# Altium PCB psu.PcbDoc
Units mm, origin at the board's own origin, x right, y up, seen from the top; angles counter-clockwise.
Board outline 40 x 40 mm, 2 copper layers (Top Layer, Bottom Layer); 21 components, 15 nets, 53 pads, 7 vias.
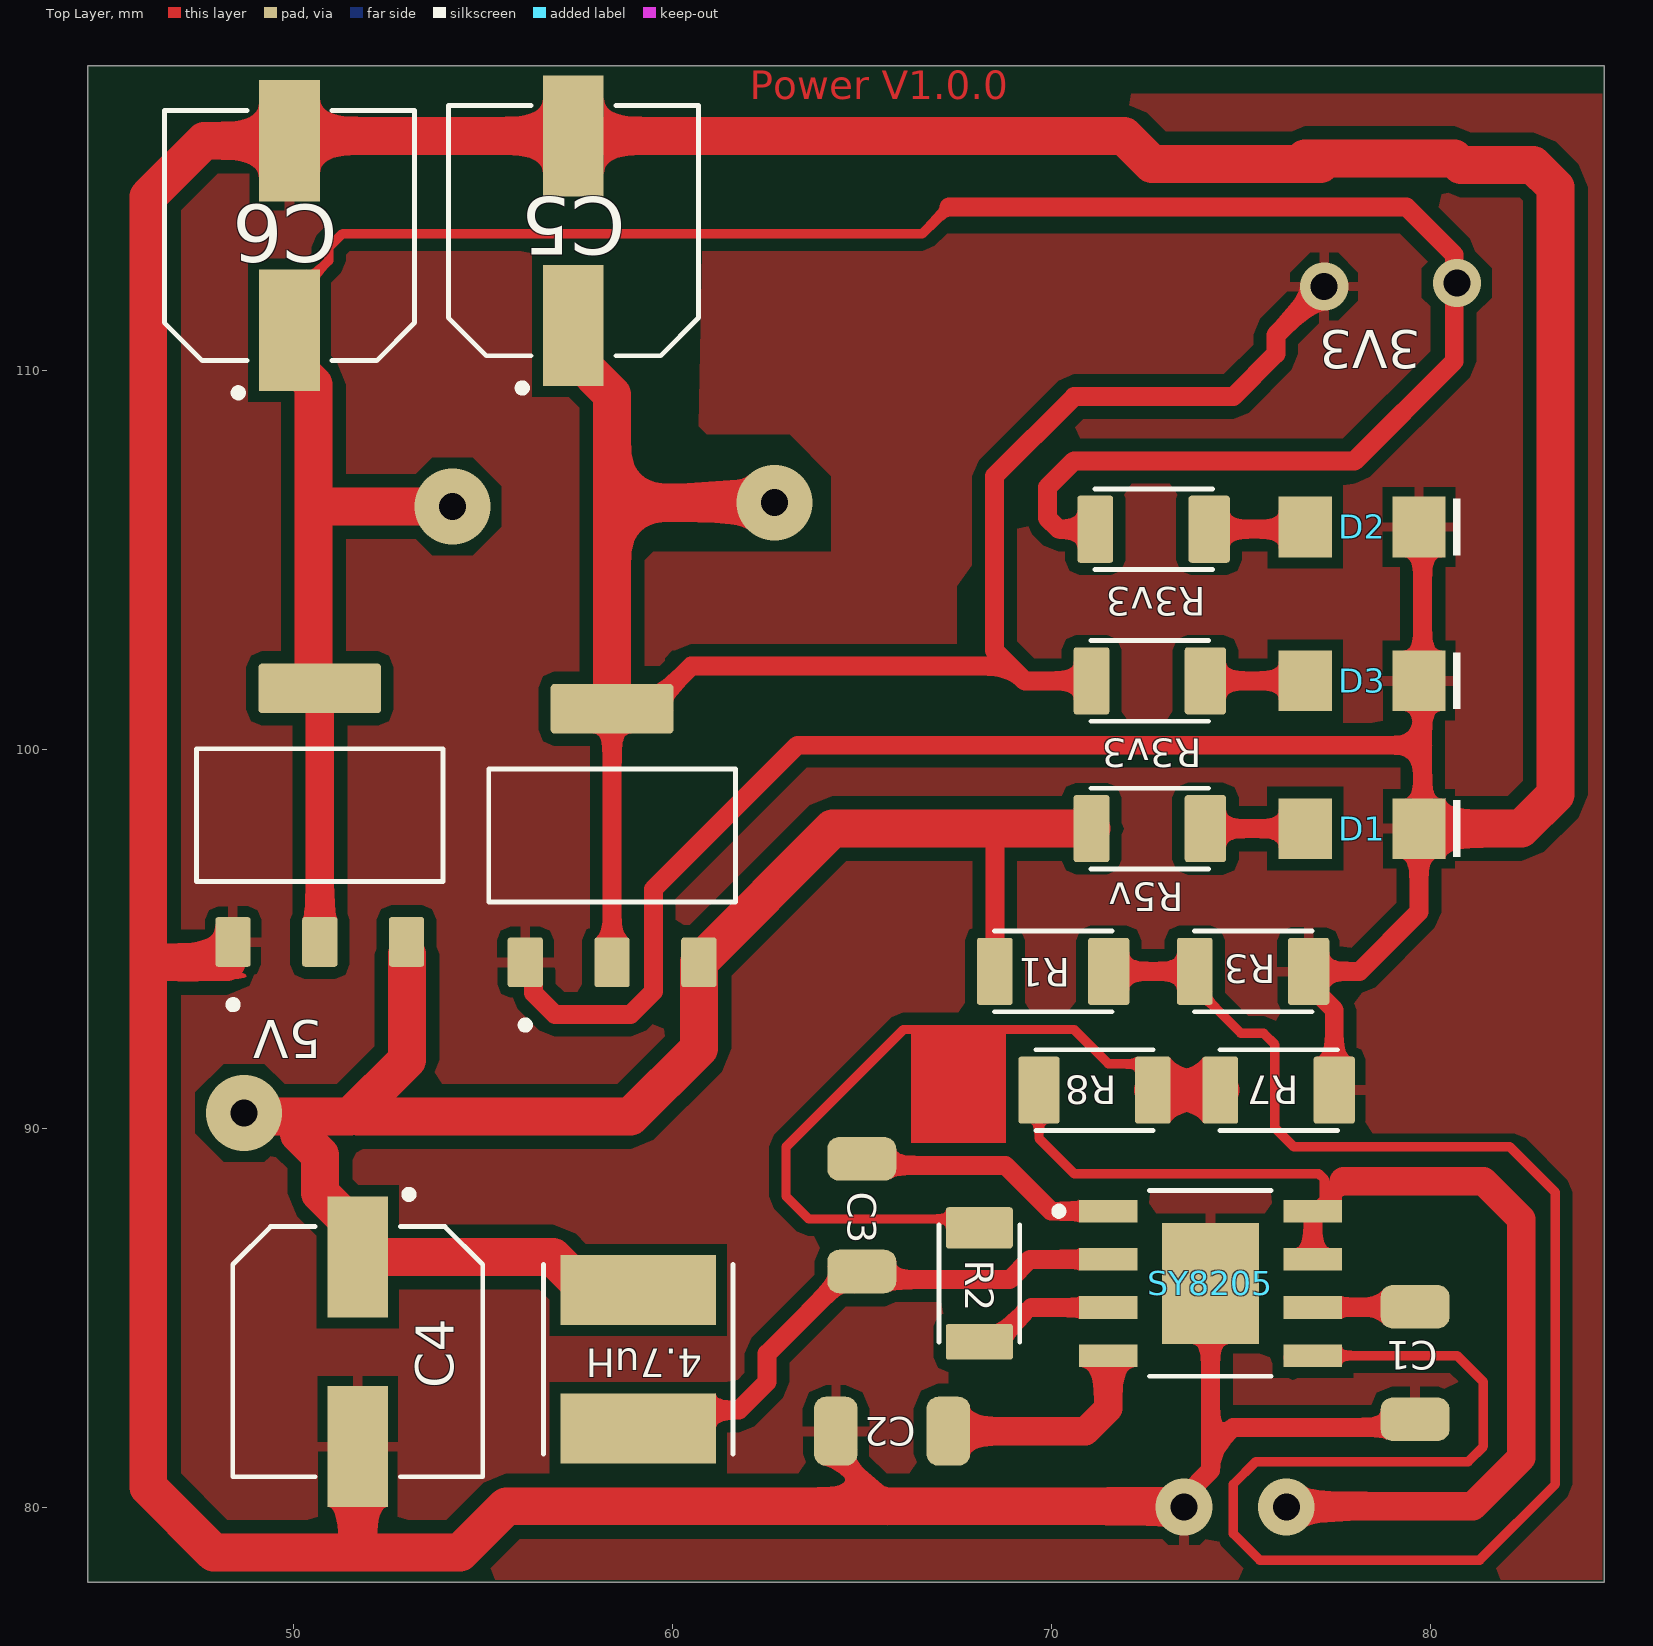
[diagram p0: Top Layer view]
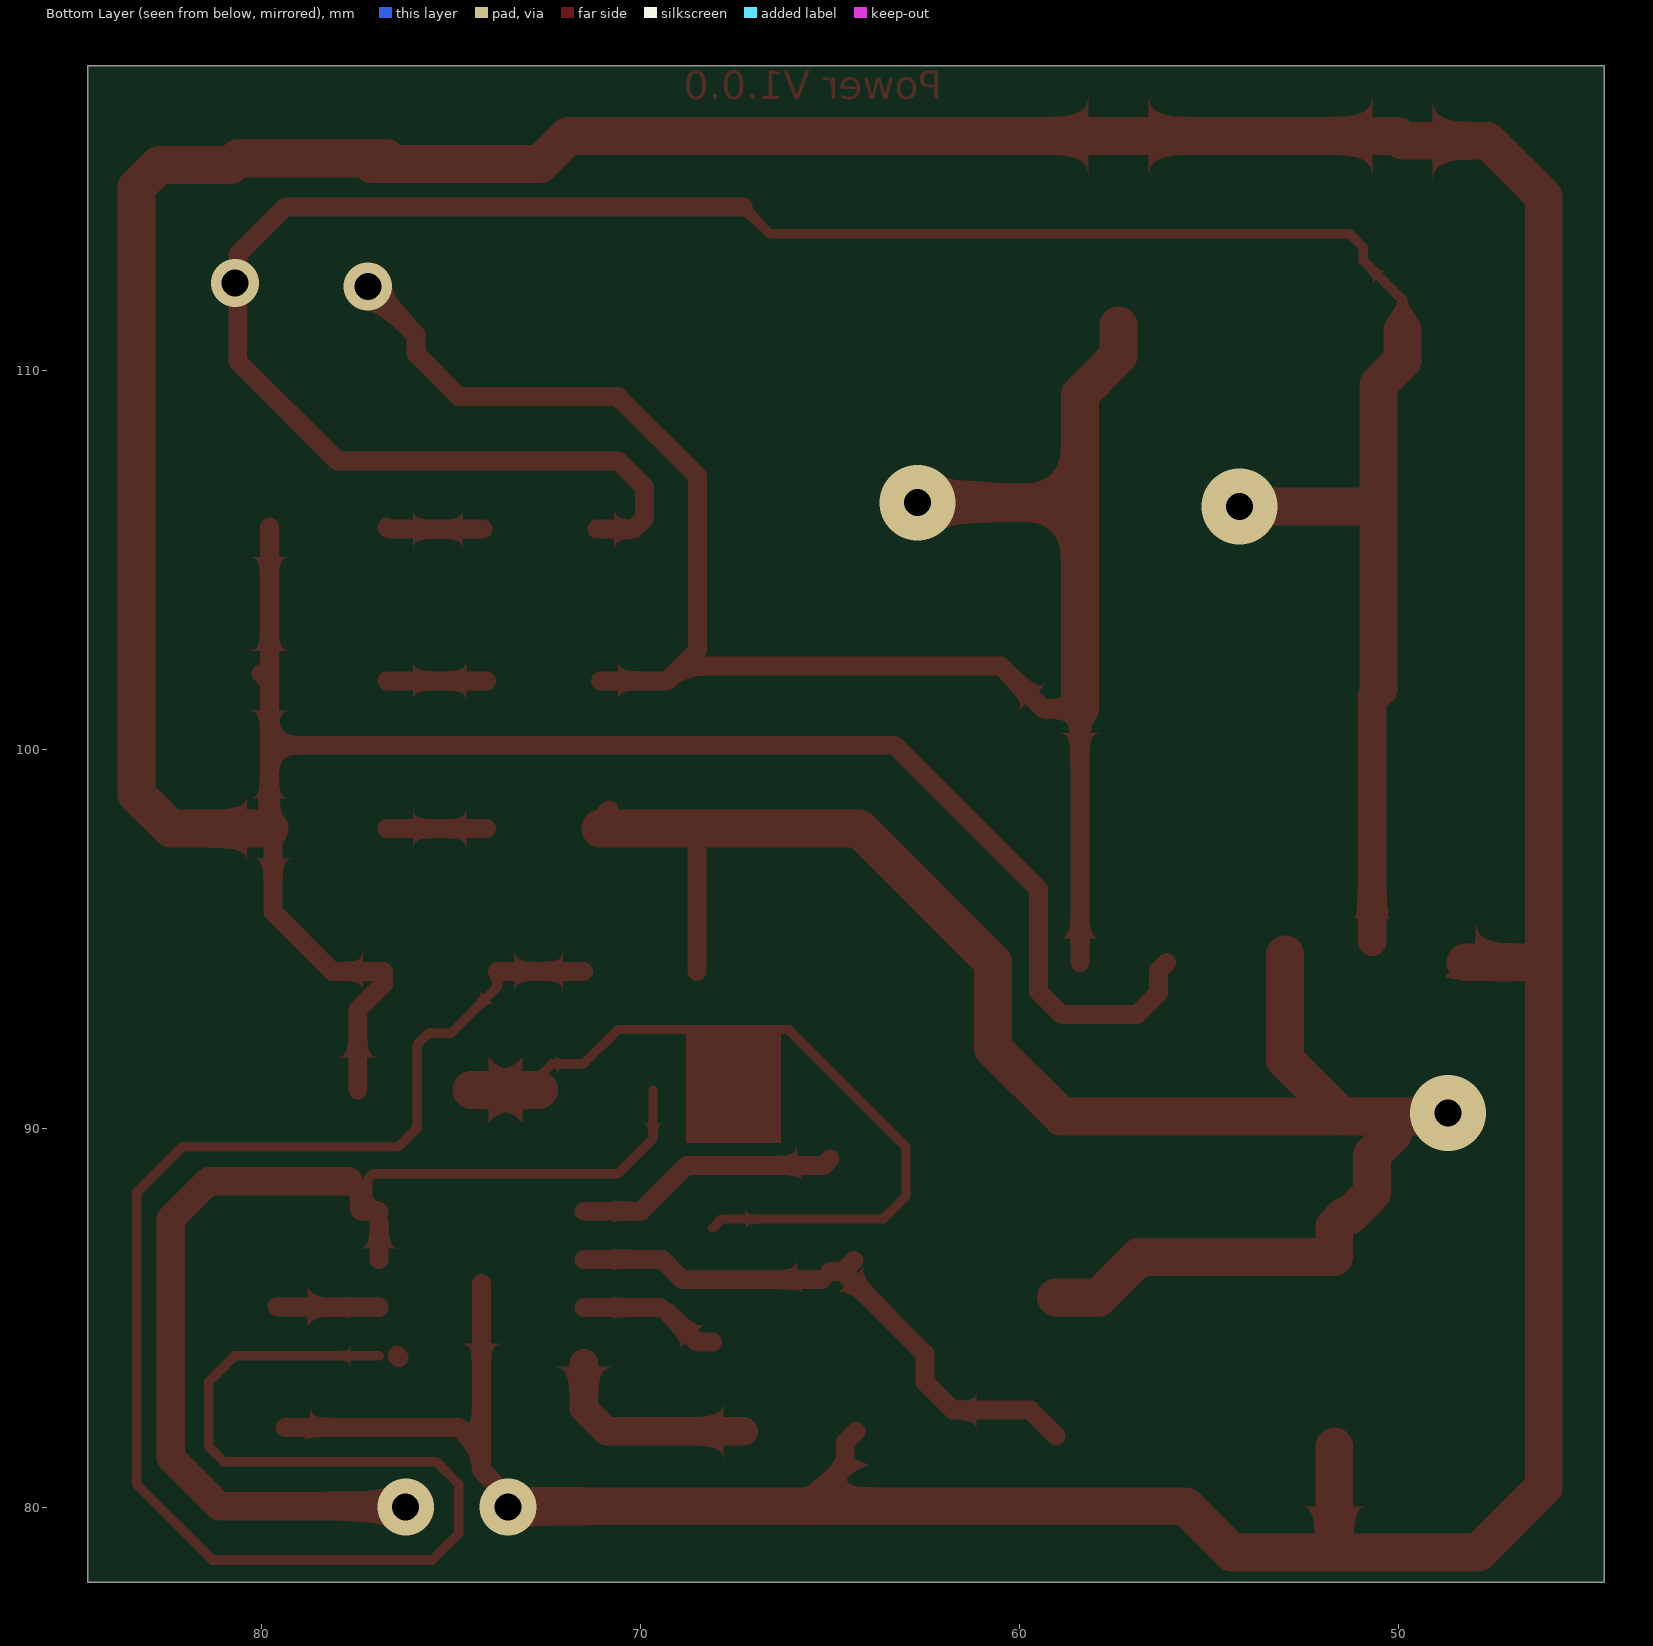
[diagram p1: Bottom Layer view, seen from below]
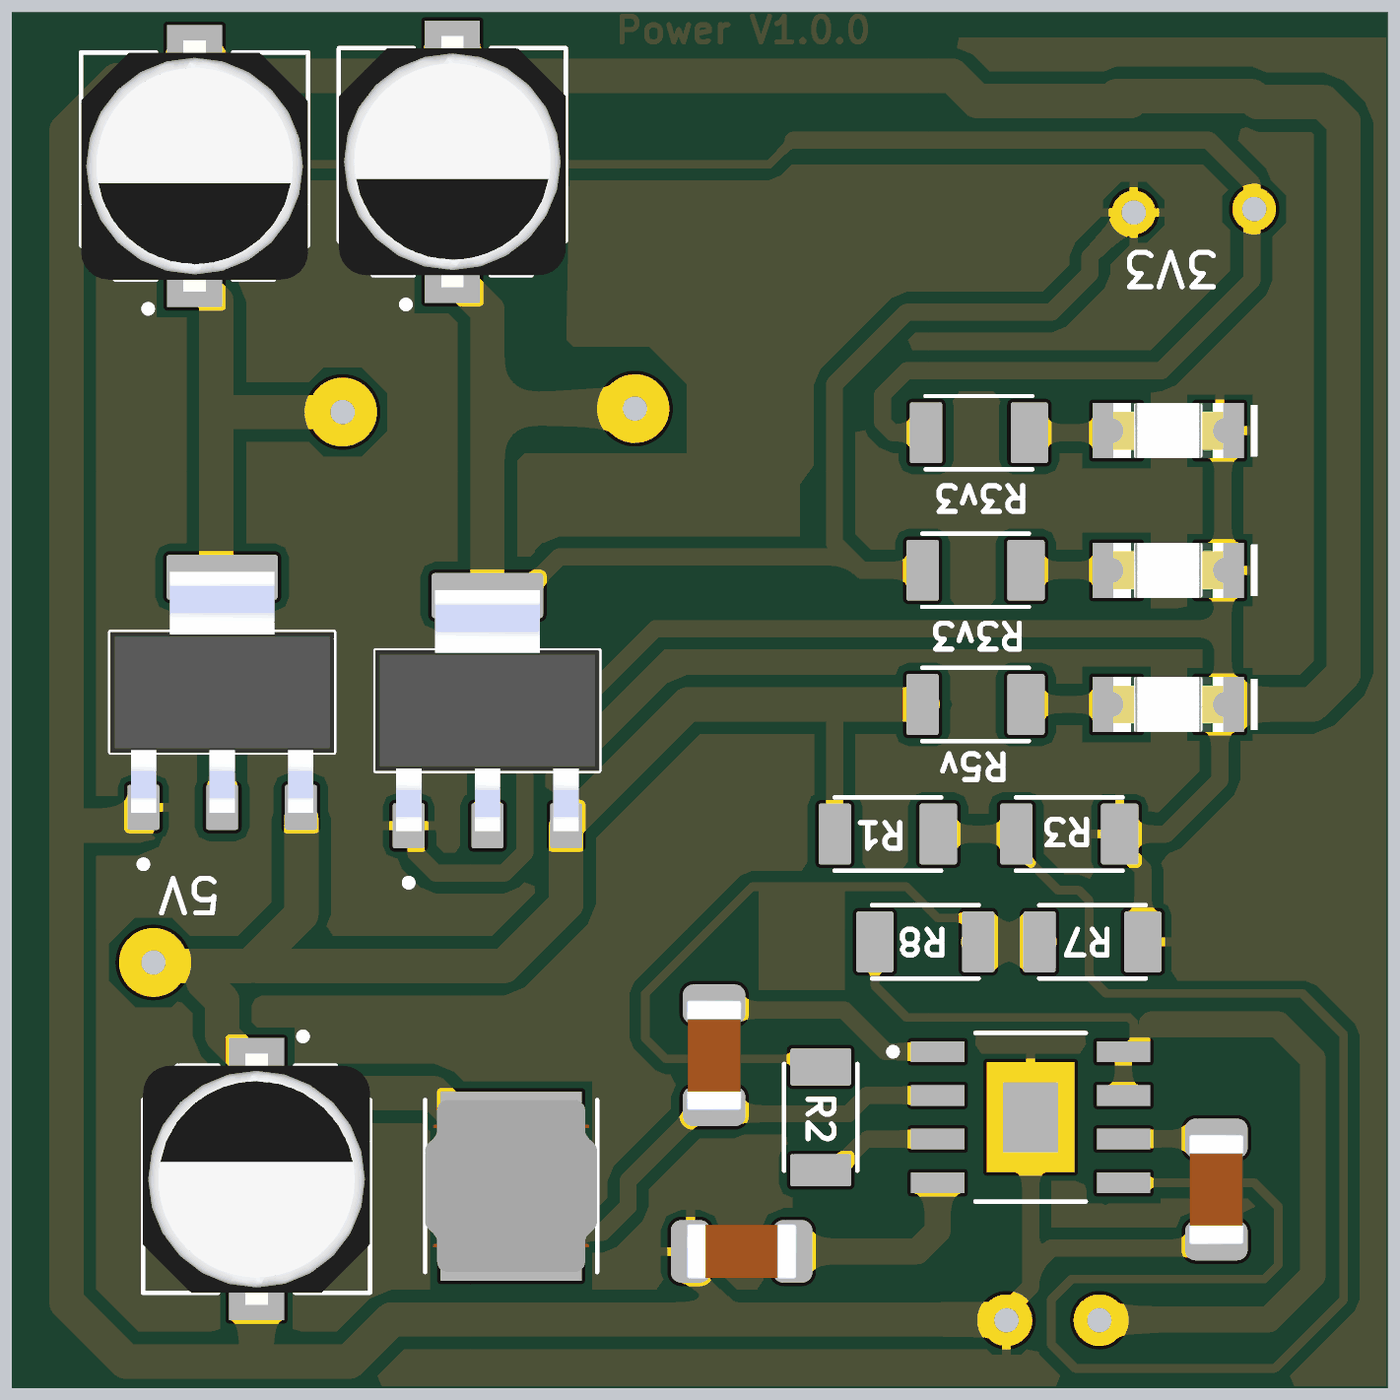
[diagram p2: 3D render of the assembled board from above, using the file's embedded part models]

## Layer stack, top to bottom
Top Solder: solder mask 0.0102, Solder Resist, Dk 3.5
Top Layer: signal copper 0.0356
Dielectric 1: dielectric 0.32, FR-4, Dk 4.8
Bottom Layer: signal copper 0.0356
Bottom Solder: solder mask 0.0102, Solder Resist, Dk 3.5

## Board outline
84.583,118.022 84.583,78.022 44.583,78.022 44.583,118.022

## Design rules (kind name [scope] priority, off if disabled: settings)
Clearance Clearance_1 [All] p1: gap=0.3 ignorepadtopadclearanceinfootprint=FALSE
PolygonConnect [All] p1: connectstyle=Relief reliefconductorwidth=0.254 reliefentries=4 polygonreliefangle="90 Angle" airgapwidth=0.254
RoutingVias [All] p1: holewidth=0.711 width=1.27 viastyle="Through Hole" minholewidth=0.711 minwidth=1.27 maxholewidth=0.711 maxwidth=1.27
SolderMaskExpansion [All] p1: expansion=0.102 istentingtop=FALSE
Width [All] p1: maxlimit=2 minlimit=0.01 preferedwidth=0.25
30 further rules are at their usual default settings.

## Classes and differential pairs
component class psu: 1K C1 C2 C3 C4 C5 C6 D1 D2 D3 L1 R1 R2 R3 R3v3 R7 R8 Sy8205 U1

## Components (designator, comment, footprint, x,y, rotation, side; value= is the part's Value field where it differs from the comment)
4.7uH "Lout" IND_LQH5BPB100MT0L 59.1,83.9 r90 top (schematic designator L1)
* "AMS1117" PCBComponent_1 49.41,106.843 r90 top
*1 "AMS1117" PCBComponent_1 57.121,106.306 r90 top
C1 "Cvcc" CAP3216X125N 79.6,83.8 r270 top
C2 "Css" CAP3216X125N 65.8,82 r180 top
C3 "Cbs" CAP3216X125N 65,87.7 r270 top
C4 "cap5v" CAP_EEEFPA221XAL 51.7,84.1 r270 top
C5 "cap3.3v" CAP_EEEFPA221XAL 57.391,113.677 r90 top
C6 "cap3.3v" CAP_EEEFPA221XAL 49.898,113.55 r90 top
D1 "Super Red, 1.9V, 140°" WL-SMCW_1206_150120xx75000 78.2,97.9 r180 top
D2 "Super Red, 1.9V, 140°" WL-SMCW_1206_150120xx75000 78.2,105.859 r180 top
D3 "Super Red, 1.9V, 140°" WL-SMCW_1206_150120xx75000 78.2,101.8 r180 top
R1 "Rfb" RESC3115X65N 70.05,94.133 r180 top
R2 "1206 10k" RESC3115X65N 68.1,85.9 r270 top
R3 "Rpd" RESC3115X65N 75.325,94.133 r180 top
R3v3 "Rled" RESC3115X65N 72.6,101.8 r180 top (schematic designator R6)
R3v3 "Rled" RESC3115X65N 72.7,105.8 r180 top (schematic designator R5)
R5v "Rled" RESC3115X65N 72.6,97.9 r180 top (schematic designator R4)
R7 "1206 100k" RESC3115X65N 76,91 r180 top
R8 "1206 100k" RESC3115X65N 71.14,91 r0 top
SY8205 "SY8205FCC" VREG_SY8205FCC 74.2,85.9 r0 top (schematic designator U1)

## Footprints (in the part's own frame and the unit in brackets; to place one, negate y for a bottom-side part, rotate by r counter-clockwise, add the part's x,y. Pads: shape width x height; smd on the part's side, far side on the other; paste and mask are expansions set on the pad)
CAP3216X125N [mm]
  rrect54% 1.15x1.82 smd: 1(-1.485,0) 2(1.485,0)
  body extent -1.6,-0.8 1.6,0.8, height 1.8
CAP_EEEFPA221XAL [mm]
  rect 3.2x1.6 smd: 1(-2.5,0) 2(2.5,0)
  silkscreen extent -4.25,-3.3 3.3,3.3, body extent -3.65,-3.3 3.65,3.3, height 7.7
IND_LQH5BPB100MT0L [mm]
  rect 1.85x4.1 smd: 1(-1.825,0) 2(1.825,0)
  silkscreen extent -2.5,-2.5 2.5,2.5, body extent -2.5,-2.5 2.5,2.5, height 2.2
PCBComponent_1 [mm]
  rrect15% 1.31x0.93 smd: 1(-11.933,1) 2(-11.933,-1.29) 3(-11.933,-3.58)
  rrect15% 1.31x3.24 smd: 2(-5.243,-1.29)
  silkscreen extent -13.69,-4.54 -6.84,1.96, body extent -12.09,-4.54 -5.09,1.96, height 1.8
RESC3115X65N [mm]
  rrect14% 1.09x1.77 smd: 1(-1.465,0)
  rrect14% 0.94x1.77 smd: 2(1.54,0)
  silkscreen extent -1.55,-1.07 1.55,1.07
VREG_SY8205FCC [mm]
  rect 1.55x0.6 smd: 1(-2.7,1.905) 2(-2.7,0.635) 3(-2.7,-0.635) 4(-2.7,-1.905) 5(2.7,-1.905) 6(2.7,-0.635) 7(2.7,0.635) 8(2.7,1.905)
  rect 2.55x3.2 smd paste-3: 9(0,0)
  silkscreen extent -4.1,-2.45 1.6,2.45
WL-SMCW_1206_150120xx75000 [mm] "SMD Mono-color Chip LED, body 3.2x1.6mm"
  rect 1.4x1.6 smd: 1(-1.5,0) 2(1.5,0)
  silkscreen extent -2.6,-0.75 -2.4,0.75, body extent -1.6,-0.8 1.6,0.8, height 0.68

## Part data
4.7uH: library part LQH5BPB100MT0L, "4.7uH 5A / 50*50", Package=NONSTANDARD, Check_prices=https://www.snapeda.com/parts/LQH5BPB100MT0L/Murata/view-part/4547622/?ref=eda, Digi-Key_Part_Number=490-9930-1-ND, MF=Murata, MP=LQH5BPB100MT0L, Purchase-URL=https://pricing.snapeda.com/search/part/LQH5BPB100MT0L/?ref=eda, SnapEDA_Link=https://www.snapeda.com/parts/LQH5BPB100MT0L/Murata/view-part/4547622/?ref=snap
C1: library part GRM31CR71H475KA12L, "1uF", Package=None, Availability=Unavailable, MP=GRM31CR71H475KA12L, Price=None
C2: library part GRM31CR71H475KA12L, "47nf 1206", Package=None, Availability=Unavailable, MP=GRM31CR71H475KA12L, Price=None
C3: library part GRM31CR71H475KA12L, "47nF 16V C1206", Package=None, Availability=Unavailable, MP=GRM31CR71H475KA12L, Price=None
C4: library part EEEFPA221XAL, "Aluminum Electrolytic Capacitors - SMD 10VDC 220uF 20% 6x8mm AEC-Q200", Package="RADIAL-2 Panasonic", Availability="In Stock", Check_prices=https://www.snapeda.com/parts/EEE-FPA221XAL/Panasonic/view-part/6178333/?ref=eda, MF=Panasonic, MP=EEE-FPA221XAL, Price=None, Purchase-URL=https://pricing.snapeda.com/search/part/EEE-FPA221XAL/?ref=eda, SnapEDA_Link=https://www.snapeda.com/parts/EEE-FPA221XAL/Panasonic/view-part/6178333/?ref=snap
C5 C6: library part EEEFPA221XAL, "100uF", Package="RADIAL-2 Panasonic", Availability="In Stock", Check_prices=https://www.snapeda.com/parts/EEE-FPA221XAL/Panasonic/view-part/6178333/?ref=eda, MF=Panasonic, MP=EEE-FPA221XAL, Price=None, Purchase-URL=https://pricing.snapeda.com/search/part/EEE-FPA221XAL/?ref=eda, SnapEDA_Link=https://www.snapeda.com/parts/EEE-FPA221XAL/Panasonic/view-part/6178333/?ref=snap
D1 D2 D3: library part 150120SS75000, "Green LED", Case/Size Code=1206, Emitting Color="Super Red", Forward Voltage=1.9V, Manufacturer="Wurth Elektronik", Operating Temperature Max=85°C, Operating Temperature Min=-40°C, Category="Signal LEDs", Chip Technology=AlInGaP, ComponentLink1Description="Website Link", ComponentLink1URL=https://www.we-online.com/redexpert/article/150120SS75000?ad, ComponentLink2Description="Datasheet Link", ComponentLink2URL=https://www.we-online.com/redexpert/spec/150120SS75000?ad, Dominant Wavelength=630nm, Height=0.68mm, Length=3.2mm, Luminous Intensity=60mcd, Manufacturer Part Number=150120SS75000, Match Code=WL-SMCW, Mount="Surface Mount", Packaging="Tape and Reel", Peak Wavelength=645nm, Viewing Angle=140°, Width=1.6mm
R1: library part 4-2176245-2, "13.2K", Package=None, Availability=Unavailable, MP=4-2176245-2, Price=None
R2: library part 4-2176245-2, "10k", Package=None, Availability=Unavailable, MP=4-2176245-2, Price=None
R3: library part 4-2176245-2, "100K", Package=None, Availability=Unavailable, MP=4-2176245-2, Price=None
R3v3 R3v3: library part 4-2176245-2, "1K", Package=None, Availability=Unavailable, MP=4-2176245-2, Price=None
R5v: library part 4-2176245-2, "3.3K", Package=None, Availability=Unavailable, MP=4-2176245-2, Price=None
R7 R8: library part 4-2176245-2, "100k", Package=None, Availability=Unavailable, MP=4-2176245-2, Price=None
SY8205: "High-Efficiency Fast Responseï¼Œ5A, 30V Input Synchronous Step Down Regulator", Package=Package, Check_prices=https://www.snapeda.com/parts/SY8205FCC/Silergy/view-part/?ref=eda, MF=Silergy, MP=SY8205FCC, SnapEDA_Link=https://www.snapeda.com/parts/SY8205FCC/Silergy/view-part/?ref=snap

## Via types
v1: diameter 2, hole 0.711, Top Layer to Bottom Layer, 3 vias
v2: diameter 1.5, hole 0.711, Top Layer to Bottom Layer, 2 vias
v3: diameter 1.27, hole 0.711, Top Layer to Bottom Layer, 2 vias

## Nets (pads, with @x,y where several pads share a name; then routed paths per layer and width w, separated by ;. In a path a pad name is that pad's centre, name@x,y a point inside that pad or via, vN(x,y) a via of type N, cw(c..) or ccw(c..) an arc to the next point about the centre after c; other vN are vias at no path point)
GND: *1.1 *.1 C1.2 C2.2 C4.2 C5.2 C6.2 D1.1 D2.1 D3.1 R3.1 R7.1 SY8205.9 | length 187.1
  Top Layer w0.5: *1.1 56.336,94.158 56.336,93.564 56.9,93 58.9,93 59.5,93.6 59.5,96.3 63.3,100.1 79.796,100.1 ; C2.2 64.603,81.712 64.603,81.097 65.678,80.022 ; v2@73.52,80.022 73.52,80.291 74.2,80.971 74.2,81.5 ; SY8205.9 74.2,81.5 ; R7.1 77.465,93.118 76.79,93.793 R3.1 78.133,94.133 79.7,95.7 79.7,97.804 79.796,97.9 79.796,100.1 ; C1.2@79.385,82.1 74.8,82.1 74.2,81.5 ; D2.1@79.796,105.859 79.796,101.99 79.796,100.1 ; D3.1@79.82,101.795 D3.1@80.015,101.99
  Top Layer w1: *.1@48.243,94.373 46.446,94.373 46.173,94.1 ; C4.2 51.7,78.9 51.6,78.8 ; v2@73.52,80.022 65.678,80.022 55.622,80.022 54.4,78.8 51.6,78.8 ; 76.695,115.582 80.632,115.582 80.805,115.409 82.714,115.409 83.3,114.823 83.3,98.8 82.4,97.9 D1.1@79.796,97.9 ; 77.1,115.44 72.655,115.44 71.918,116.177 C5.2 50.025,116.177 C6.2 47.65,116.05 46.173,114.573 46.173,94.1 ; 46.173,94.1 46.173,80.527 47.9,78.8 51.6,78.8
  other v2: 73.5,80
Net*1_2: *1.2 C5.1 R3v3.2@71.06,101.8 | length 51
  Top Layer w0.5: *1.2@58.411,94.373 58.411,101.063 59.376,101.063 60.5,102.187 68.913,102.187 ; R3v3.2@71.06,101.8 69.3,101.8 68.913,102.187 ; v3(77.2,112.2) 75.926,110.926 75.926,110.426 74.8,109.3 70.6,109.3 68.5,107.2 68.5,102.6 68.913,102.187
  Top Layer w1: C5.1 57.391,110.377 58.411,109.357 58.411,106.5 ; *1.2@58.411,101.063 58.411,106.5 ; v1(62.7,106.5) 58.411,106.5
Net*1_3: 4.7uH.2 *1.3 *.3 C4.1 R1.2 R5v.2 | length 47.1
  Top Layer w0.5: R1.2 68.51,97.81 68.6,97.9 ; R5v.2@70.84,98.396 R5v.2@70.886,98.35
  Top Layer w1: v1@48.8,90.3 51.5,90.3 53,91.8 *.3@53,94.586 ; 50.145,89.848 50.7,89.293 50.7,88.286 51.286,87.7 51.4,87.7 51.7,87.4 C4.1 56.847,86.6 57.917,85.53 4.7uH.2@59.042,85.53 ; 51.707,90.3 58.9,90.3 60.701,92.101 *1.3 64.228,97.9 68.6,97.9 R5v.2
  other v1: 48.7,90.4
Net*_2: *.2 C6.1 R3v3.2@71.16,105.8 | length 70.4
  Top Layer w0.25: C6.1 49.898,111.85 50.937,112.888 50.937,113.237 51.3,113.6 66.6,113.6 67.3,114.3 ; *.2@50.533,101.6 *.2@50.7,101.433
  Top Layer w0.5: 67.3,114.3 79.374,114.3 80.632,113.042 80.632,110.232 78,107.6 70.593,107.6 69.9,106.907 69.9,106.093 70.193,105.8 R3v3.2@71.16,105.8
  Top Layer w0.75: *.2@50.7,94.91 *.2@50.7,101.433
  Top Layer w1: C6.1 49.898,110.25 50.533,109.615 50.533,106.4 ; *.2@50.533,101.6 50.533,106.4 ; v1@54.1,106.4 50.533,106.4
  other v1: 54.2,106.4
  other v3: 80.7,112.3
NetC1_1: C1.1 SY8205.6 | length 2.7
  Top Layer w0.5: SY8205.6 76.91,85.275 79.59,85.275 C1.1
NetC2_1: C2.1 SY8205.4 | length 5.7
  Top Layer w0.75: C2.1 70.9,82 71.5,82.6 SY8205.4@71.5,83.8
NetC3_1: C3.1 SY8205.1 | length 7.1
  Top Layer w0.5: C3.1 65.17,89.015 68.785,89.015 69.995,87.805 SY8205.1
NetC3_2: 4.7uH.1 C3.2 SY8205.2 | length 15.4
  Top Layer w0.25: C3.2 C3.2@65.215,86
  Top Layer w0.5: 4.7uH.1@59.042,81.88 59.717,82.555 61.755,82.555 62.5,83.3 62.5,84.05 C3.2@64.665,86.215 ; C3.2@64.377,86.503 C3.2@64.665,86.215 ; C3.2 C3.2@64.665,86.215 ; C3.2@65.215,86 68.9,86 69.435,86.535 SY8205.2
NetCON1_2: R8.1 SY8205.7 SY8205.8 | length 31.2
  Top Layer w0.25: R8.1 69.675,89.725 70.6,88.8 77.054,88.8 77.2,88.654 SY8205.8@77.2,88.105 ; SY8205.8 SY8205.8@77.2,88.105 ; SY8205.8@77.2,87.805 SY8205.8@77.2,88.105
  Top Layer w0.5: SY8205.7 76.9,87.5 ; SY8205.8 77.375,87.805 77.425,87.855 77.425,88.105 77.425,88.307 77.718,88.6
  Top Layer w0.75: v2@76.06,80.022 81.122,80.022 82.4,81.3 82.4,87.6 81.4,88.6 77.718,88.6
  other v2: 76.2,80
NetD1_2: D1.2 R5v.1 | length 2.6
  Top Layer w0.5: R5v.1 D1.2
NetD2_2: D2.2 R3v3.1@74.165,105.8 | length 2.6
  Top Layer w0.5: R3v3.1@74.165,105.8 76.641,105.8 D2.2
NetD3_2: D3.2 R3v3.1@74.065,101.8 | length 2.6
  Top Layer w0.5: R3v3.1@74.065,101.8 D3.2
NetR1_1: R1.1 R3.2 SY8205.5 | length 47.9
  Top Layer w0.25: R3.2 73.785,93.718 75.003,92.5 75.6,92.5 75.9,92.2 75.9,90 76.4,89.5 82.1,89.5 83.3,88.3 83.3,80.6 81.3,78.6 75.5,78.6 74.8,79.3 74.8,80.6 75.4,81.2 81,81.2 81.4,81.6 81.4,83.3 80.705,83.995 SY8205.5
  Top Layer w0.5: R1.1 R3.2 ; SY8205.5@76.375,83.945 SY8205.5@76.425,83.995
NetR2_1: R2.1 R7.2 R8.2 | length 20.4
  Top Layer w0.25: R2.1 67.865,87.6 63.6,87.6 63,88.2 63,89.5 66.1,92.6 70.6,92.6 71.506,91.694 72.335,91.694 72.68,91.349 R8.2
  Top Layer w1: R8.2 R7.2
NetR2_2: R2.2 SY8205.3 | length 3.5
  Top Layer w0.5: R2.2 68.515,84.36 69.285,85.13 ; 69.472,85.265 SY8205.3

## Polygon pours and split planes (outlines as drawn)
GND on Top Layer "GND_L01_P003" (solid, remove dead copper, pour order 3): 45.943,78.386 46.243,78.086 84.543,78.086 84.543,117.286 45.943,117.286
Net*1_2 on Top Layer "NET*1_2_L01_P002" (solid, remove dead copper, pour order 2): 59.8,102.2 59.2,102.2 59.2,104.9 59.5,105.2 64.2,105.2 64.2,107.2 63.1,108.3 60.7,108.3 60.8,113.6 61.1,113.6 62.9,113.6 79.2,113.6 80,112.8 80,110.5 77.5,108 70.2,108 67.5,104.3 67.5,103.5 67.5,102.6 60,102.6 59.8,102.4 59.8,102.1

## Other copper
Top Layer:
  rectangle net NetR2_1: 66.3,89.6 68.8,92.6
  text "Power V1.0.0" at 62.05,117.15 h0.75

## Silkscreen, mask and mechanical layers (free items; w line width, h text height)
Top Overlay:
  text "3V3" at 79.75,111.05 h1 r180
  text "5V" at 50.75,92.85 h1 r180